# Altium PCB 3.3 Buck.PcbDoc
Units mm, origin at the board's own origin, x right, y up, seen from the top; angles counter-clockwise.
Board outline 48.13 x 18.67 mm, 2 copper layers (Top Layer, Bottom Layer); 10 components, 6 nets, 30 pads, 4 vias.
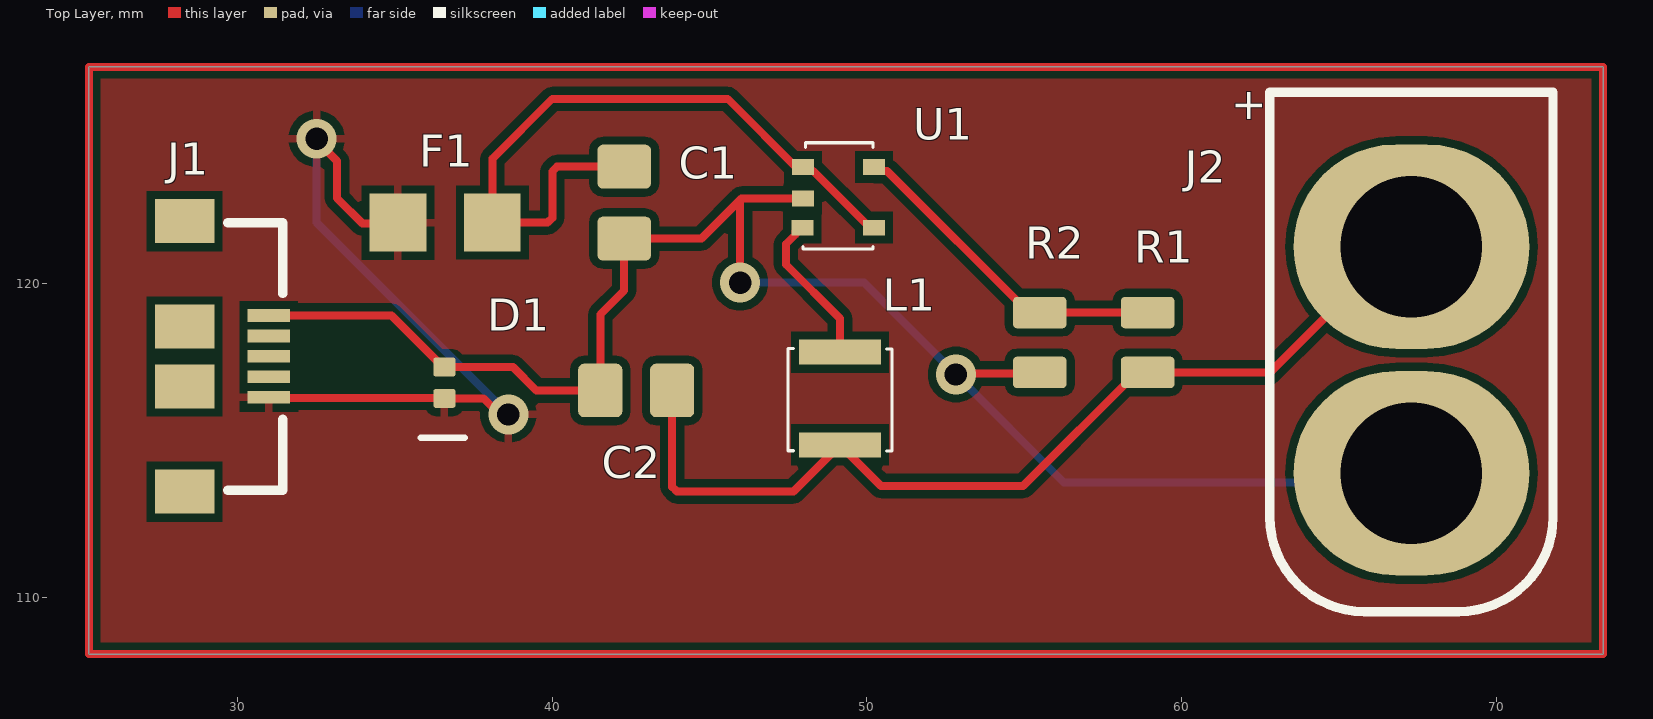
[diagram p0: Top Layer view]
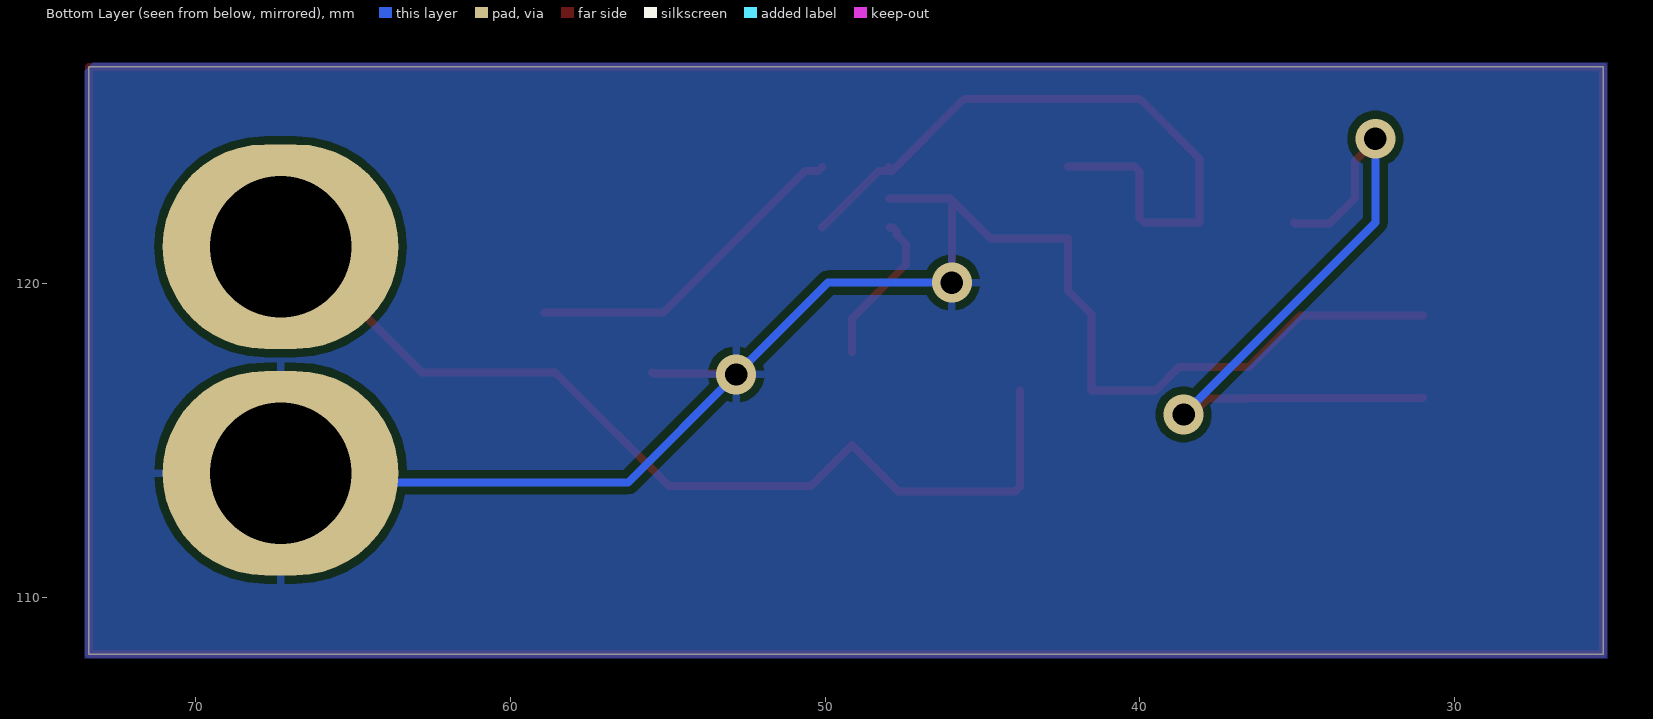
[diagram p1: Bottom Layer view, seen from below]
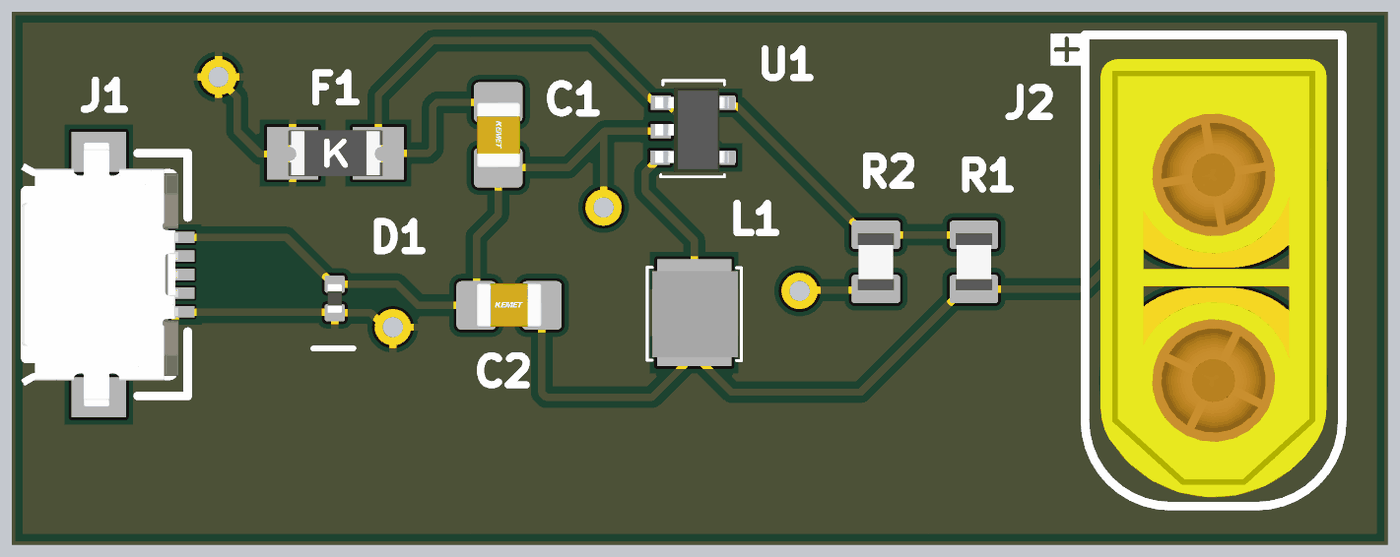
[diagram p2: 3D render of the assembled board from above, using the file's embedded part models]

## Layer stack, top to bottom
Top Solder: solder mask 0.0102, Solder Resist, Dk 3.5
Top Layer: signal copper 0.0356
Dielectric 1: dielectric 0.32, FR-4, Dk 4.8
Bottom Layer: signal copper 0.0356
Bottom Solder: solder mask 0.0102, Solder Resist, Dk 3.5

## Board outline
25.273,108.204 25.273,126.873 73.406,126.873 73.406,108.204

## Design rules (kind name [scope] priority, off if disabled: settings)
Clearance [All] p1: gap=0.25 ignorepadtopadclearanceinfootprint=TRUE
PolygonConnect [All] p1: connectstyle=Relief reliefconductorwidth=0.254 reliefentries=4 polygonreliefangle="90 Angle" airgapwidth=0.254
RoutingVias [All] p1: holewidth=0.711 width=1.27 viastyle="Through Hole" minholewidth=0.711 minwidth=1.27 maxholewidth=0.711 maxwidth=1.27
SolderMaskExpansion [All] p1: expansion=0.102 istentingtop=FALSE
Width [All] p1: maxlimit=1 minlimit=0.25 preferedwidth=0.25
30 further rules are at their usual default settings.

## Components (designator, comment, footprint, x,y, rotation, side; value= is the part's Value field where it differs from the comment)
C1 "10uF INPUT" CAP_0805 42.291,122.555 r270 top
C2 "10uF OUTPUT" CAP_0805 42.672,116.586 r0 top
D1 "D_TVS_0402" D_0402 36.576,116.832 r270 top
F1 "F1206" FUSE_1206 36.6,121.92 r0 top
J1 "USB3100-30-A" USB3100-30-A 28.934,117.668 r270 top
J2 "XT60UPB-M" XT60UPB-M 67.31,117.558 r90 top
L1 "4.7μH, 1A" "4.7µH, 1A" 49.149,116.332 r270 top value=4.7uH
R1 "10K" RES_0805 58.928,118.11 r270 top
R2 "6.8K" RES_0805 55.499,118.11 r90 top
U1 "AP3406-3.3" SOT-23 49.276,122.936 r0 top

## Footprints (in the part's own frame and the unit in brackets; to place one, negate y for a bottom-side part, rotate by r counter-clockwise, add the part's x,y. Pads: shape width x height; smd on the part's side, far side on the other; paste and mask are expansions set on the pad)
"4.7µH, 1A" [mm]
  rect 0.8x2.6 smd: 1(-1.475,0) 2(1.475,0)
  silkscreen extent -1.59,-1.65 1.68,1.65, body extent -1.45,-1.47 1.55,1.53, height 1.51
CAP_0805 [mm]
  rrect25% 1.4x1.7 smd: 1(-1.143,0) 2(1.143,0)
  body extent -1.15,-0.76 1.15,0.79, height 1.01
D_0402 [mm]
  rrect25% 0.6x0.7 smd: A(-0.5,0) K(0.5,0)
  silkscreen extent 1.75,-0.75 1.75,0.65, body extent -0.5,-0.25 0.5,0.25, height 0.51
FUSE_1206 [mm]
  rect 1.8x1.84 smd: 1(-1.5,0) 2(1.5,0)
  body extent -1.65,-0.82 1.65,0.81, height 0.84
RES_0805 [mm]
  rrect25% 1x1.7 smd: 1(-0.95,0) 2(0.95,0)
  body extent -1,-0.63 1,0.63, height 0.47
SOT-23 [mm]
  rect 0.7x0.5 smd: 1(-1.3,0.75) 2(-1.3,-0.25) 3(-1.325,-1.175) 4(0.95,-1.175) 5(0.95,0.75)
  silkscreen extent -1.3,-1.85 0.92,1.53, body extent -1.51,-1.68 1.41,1.28, height 1.46
USB3100-30-A [mm]
  rect 0.4x1.35 smd mask+0.07: 1(1.3,2.063) 2(0.65,2.063) 3(0,2.063) 4(-0.65,2.063) 5(-1.3,2.063)
  rect 1.4x1.9 smd: SH(-4.3,-0.613) SH(4.3,-0.613)
  rect 1.4x1.9 smd mask+0.3: SH(-0.95,-0.613) SH(0.95,-0.613)
  silkscreen extent -4.25,0.75 4.25,2.5, body extent -4.61,-3.34 4.61,2.16, height 2.69
XT60UPB-M [mm]
  oval 6.5x7.5 hole 4.5 paste-2539.97: 1(3.6,0) 2(-3.6,0)
  silkscreen extent -8,-4.5 8.5,4.5, body extent -7.69,-3.95 7.65,3.95, height 13.51

## Part data
C1 C2: library part CAP_0805, "Capacitor SMD 0805"
D1: "Diode TVS / ESD 0402"
F1: library part FUSE_PPTC_1206, "Fuse PPTC SMD 1206"
J1: "USB Connector Type Micro B 2.0 SMD Reverse Mount", Manufacturer=GCT, Manufacturer Part Number=USB3100-30-A
J2: "XT60 vertical male 2-pin AMASS", Manufacturer=AMASS, Manufacturer Part Number=XT60UPB-M
L1: library part LQH3NPN4R7MM0L, "FIXED IND 4.7UH 0.88A 156MOHM", Case Code (Imperial)=1212, Current Rating=1.25A, DC Resistance (DCR)=156mR, Inductance Tolerance=20%, Manufacturer=Murata, Max Operating Temperature=85°C, Min Operating Temperature=-40°C, Package Quantity=1, Saturation Current=880mA, Self Resonant Frequency=65MHz, Supplier Part Number=2470318, Test Frequency=1MHz, Case/Package=1212, Category="Fixed Inductors", ComponentLink1Description=https://datasheet.ciiva.com/30489/0900766b81256151-30489978.pdf?src-supplier=Rs, ComponentLink1URL=https://datasheet.ciiva.com/30489/0900766b81256151-30489978.pdf?src-supplier=Rs, ComponentLink2Description=https://datasheet.ciiva.com/3080/l0075s0103lqh3np-m0-3080279.pdf?src-supplier=Avnet, ComponentLink2URL=https://datasheet.ciiva.com/3080/l0075s0103lqh3np-m0-3080279.pdf?src-supplier=Avnet, ComponentLink3Description=https://datasheet.ciiva.com/6705/l0075s0103lqh3np-m0-6705701.pdf?src-supplier=Digikey, ComponentLink3URL=https://datasheet.ciiva.com/6705/l0075s0103lqh3np-m0-6705701.pdf?src-supplier=Digikey, Core Material=Ferrite, DC Current=1.25A, Depth=3.2mm, Height=1.5mm, Height - Seated (Max)=0.059inch, Lead Free="Lead Free", Length=0.118inch, Manufacturer Part Number=LQH3NPN4R7MM0L, Max DC Current=1.25A, Military Standard=Not, Mounting Technology="Surface Mount", Packaging="Tape and Reel", Pricing="1=0.31, 50=0.188, 100=0.171, 250=0.14, 500=0.124, 1000=0.109, 5000=0.0975 (GBP)", Reach SVHC Compliant=No, RoHS=Yes, RoHS Compliant=Yes, Series=LQH3NP_M0, Shielding=Shielded, Supplier=Farnell, Tolerance=20%, Width=0.118inch
R1 R2: library part RES_0805, "Resistor SMD 0805"
U1: library part AP3406KT

## Via types
v1: diameter 1.27, hole 0.711, Top Layer to Bottom Layer, 4 vias

## Nets (pads, with @x,y where several pads share a name; then routed paths per layer and width w, separated by ;. In a path a pad name is that pad's centre, name@x,y a point inside that pad or via, vN(x,y) a via of type N, cw(c..) or ccw(c..) an arc to the next point about the centre after c; other vN are vias at no path point)
3.3V: L1.1 U1.3 | length 4.9
  Top Layer w0.254: U1.3 47.851,121.761 47.728,121.638 47.728,121.538 47.425,121.235 47.425,120.596 49.149,118.872 L1.1
GND: C1.2 C2.1 D1.A J1.5 J2.2 R2.1 U1.2 | length 52.2
  Top Layer w0.254: J1.5 34.89,118.968 36.526,117.332 D1.A 38.751,117.332 39.497,116.586 C2.1 41.529,118.999 42.291,119.761 C1.2 44.743,121.412 45.956,122.625 ; v1(45.974,120.015) 45.974,122.643 46.017,122.686 ; 46.042,122.686 47.749,122.686 U1.2 ; v1(52.832,117.094) 52.865,117.127 55.466,117.127 R2.1
  Bottom Layer w0.254: v1(45.974,120.015) 49.911,120.015 v1(52.832,117.094) 56.261,113.665 67.017,113.665 J2.2
NetC1_1: C1.1 F1.2 U1.1 U1.4 | length 22.4
  Top Layer w0.254: C1.1 40.154,123.698 40.005,123.549 40.005,122.069 39.856,121.92 F1.2 38.1,123.952 40.005,125.857 45.578,125.857 47.872,123.563 U1.1@47.976,123.563 ; U1.1 48.099,123.563 48.297,123.563 49.976,121.884 50.003,121.884 50.099,121.788 U1.4@50.099,121.761
NetC2_2: C2.2 J2.1 L1.2 R1.2 | length 30.9
  Top Layer w0.254: C2.2 43.815,113.524 43.964,113.375 47.667,113.375 L1.2 50.456,113.55 54.968,113.55 58.578,117.16 R1.2 62.812,117.16 66.81,121.158 J2.1
NetR1_1: R1.1 R2.2 U1.5 | length 10.7
  Top Layer w0.254: U1.5@50.099,123.686 50.222,123.563 50.646,123.563 55.149,119.06 R2.2 R1.1
VCC: D1.K F1.1 J1.1 | length 23.6
  Top Layer w0.254: J1.1 31.014,116.35 36.558,116.35 D1.K 37.825,116.332 38.333,115.824 v1(38.608,115.824) ; v1(32.512,124.587) 32.512,124.528 33.159,123.881 33.159,122.698 33.968,121.889 35.069,121.889 F1.1
  Bottom Layer w0.254: v1(32.512,124.587) 32.512,121.92 v1(38.608,115.824)
pads on no net: J1.2 J1.3 J1.4 J1.SH
copper on no net: | length 133.6
  Top Layer w0.254: 25.273,108.204 73.406,108.204 73.406,126.873 25.273,126.873 25.273,108.204

## Polygon pours and split planes (outlines as drawn)
GND on Bottom Layer "GND_L02_P001" (solid, remove dead copper, pour order 1): 25.146,127 73.279,127 73.533,126.746 73.533,108.077 25.146,108.077
VCC on Top Layer "VCC_L01_P000" (solid, remove dead copper, pour order 0): 25.273,126.873 73.406,126.873 73.406,108.204 25.273,108.204

## Text inside footprints (layer, text, board x,y; h text height)
J2: Mechanical 13 "+" at 65.21,118.743 h1 r90; Top Overlay "+" at 62.567,125.067 h1 r90